# EAGLE board pinoccio (EAGLE 7.2.0)
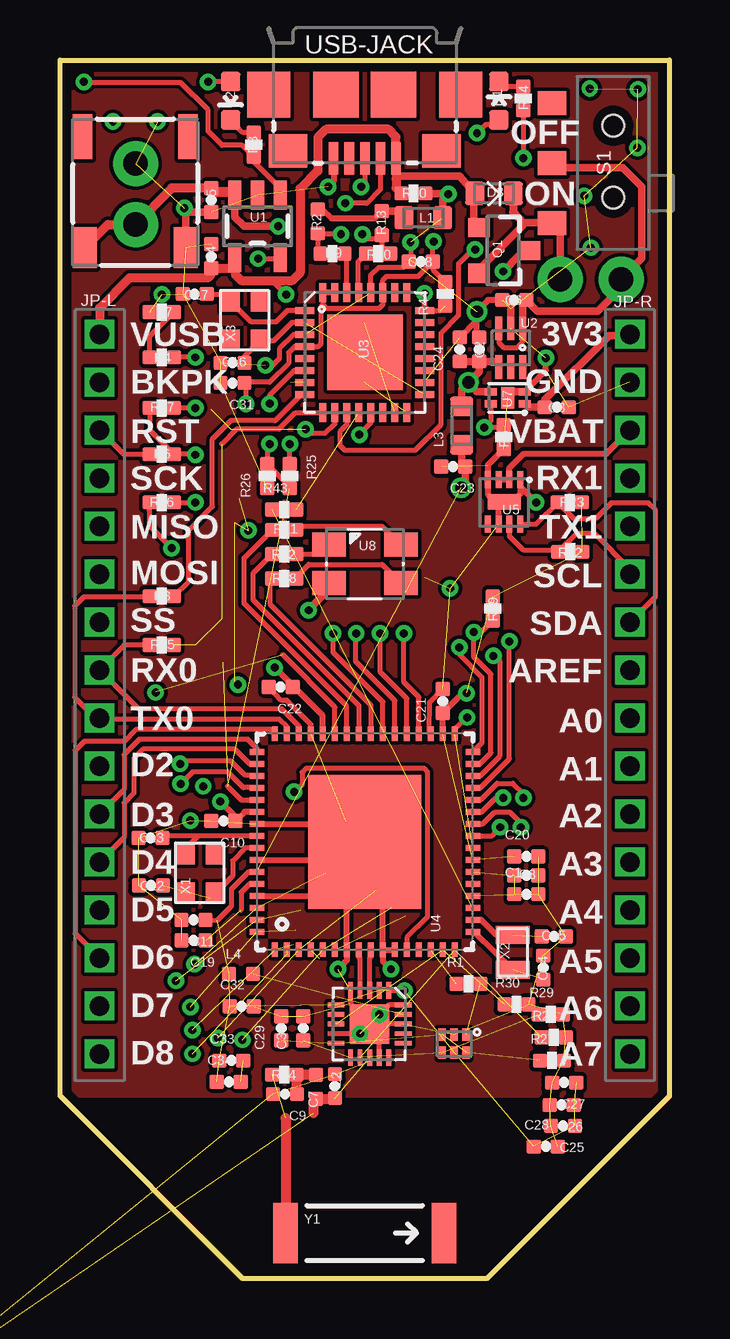
[diagram p0: board, top side]
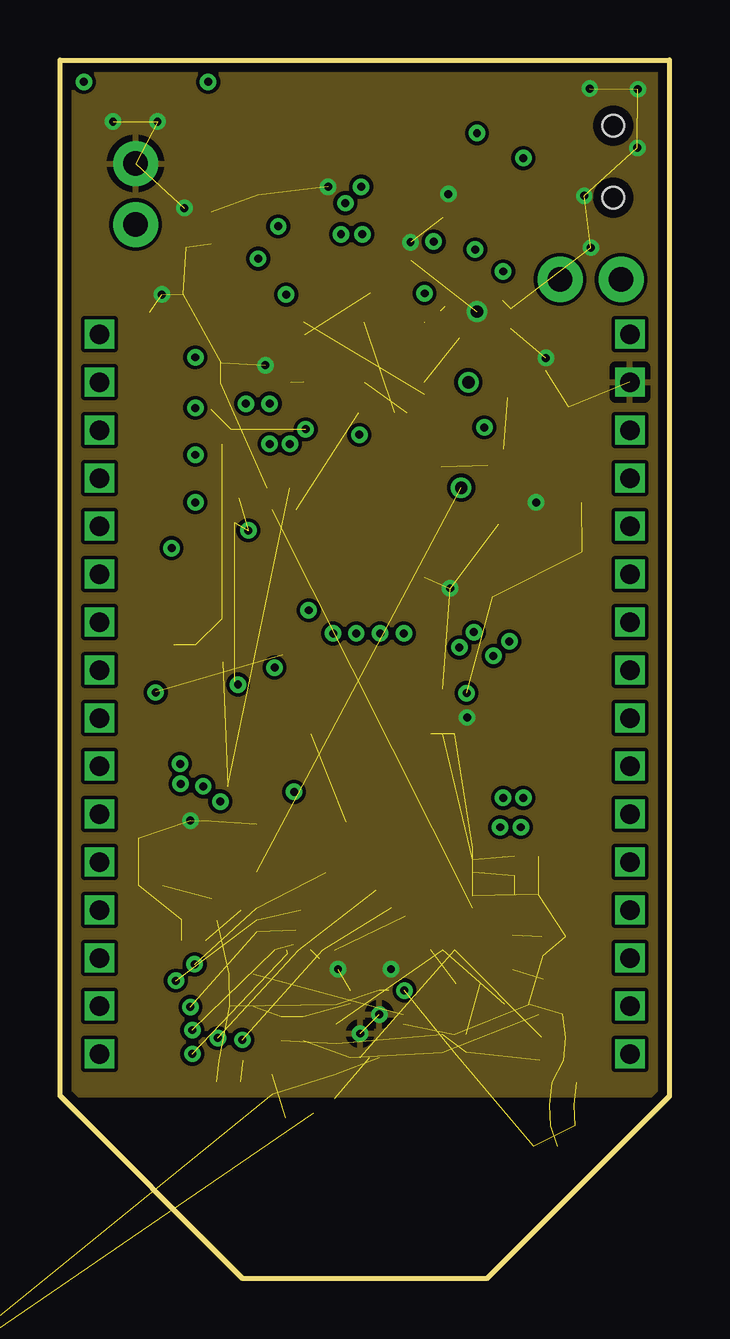
[diagram p1: board, inner layer Ground]
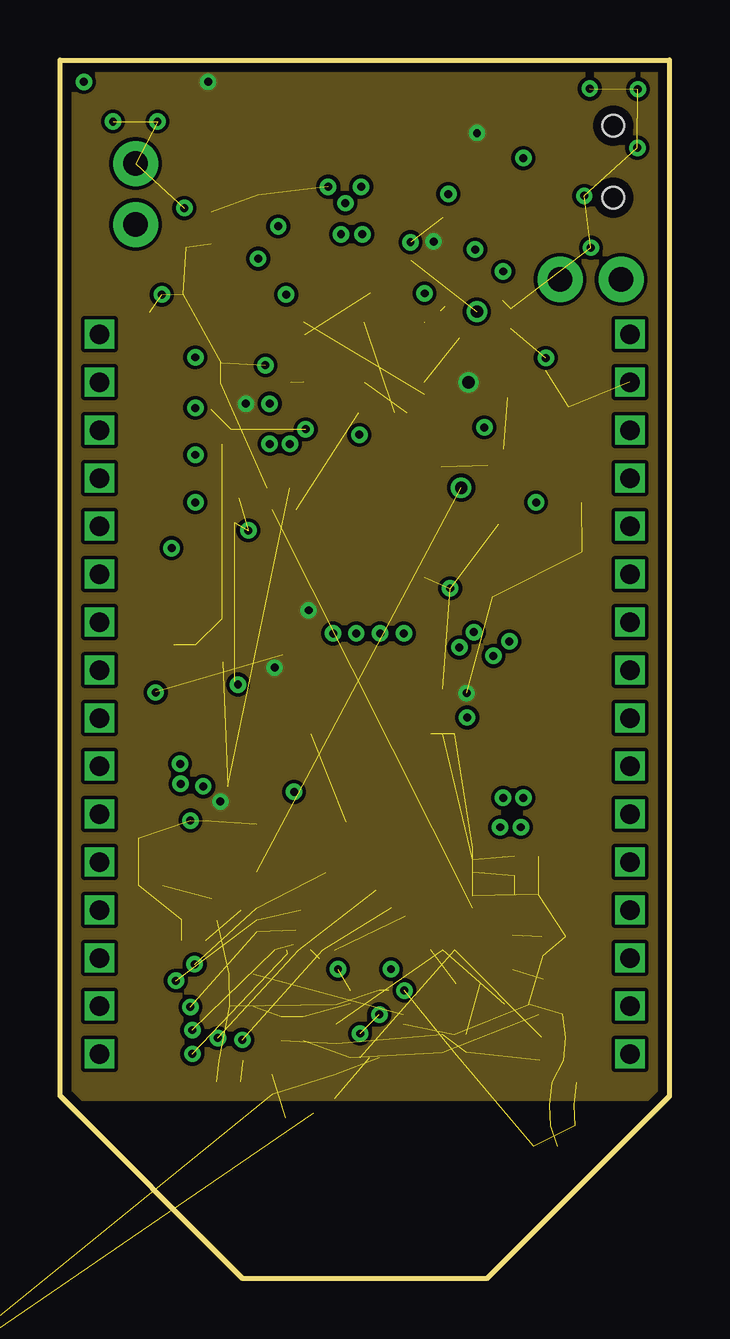
[diagram p2: board, inner layer Power]
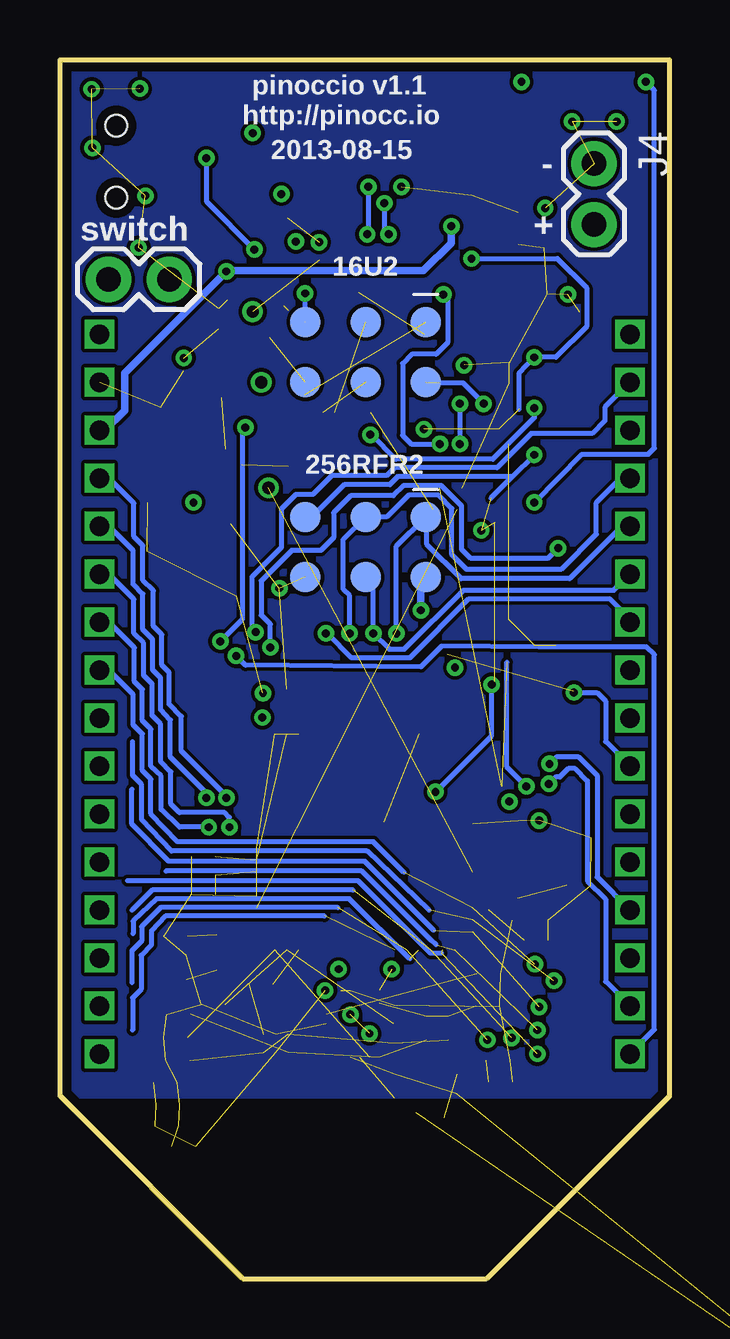
[diagram p3: board, bottom side, seen from below]

Size 25.4 x 50.8 mm. Coordinates in mm from the lower left corner, seen from the top.
Outline: 17.78,0 7.62,0 0,7.62 0,50.8 25.4,50.8 25.4,7.62 17.78,0
Copper layers (1*2*15*16): Top 0.0356mm / dielectric 1.5011mm / Ground 0.0356mm / dielectric 0.1499mm / Power 0.0356mm / dielectric 0.2007mm / Bottom 0.0356mm
Design rules "default *": minimum track width 6mil, minimum drill 13mil, track to track 6mil, track to pad 6mil, pad to pad 6mil, via to via 6mil, smd to smd 6mil, copper to edge 15mil, drill to drill 6mil, minimum pad ring 7mil, minimum via ring 7mil, stop-mask expansion 4mil, vias tented up to drill 16mil, thermal gap 10mil
Net classes: 0 Default: width 0.203 mm; 1 VCC: width 0.203 mm; 2 AVCC: width 0.203 mm; 3 ButtonSignal: width 0.203 mm; 4 RF Antenna: width 0.305 mm; 5 GND: width 0.203 mm; 6 AGND: width 0.203 mm
tKeepout: area 12.5,11.3 to 13.4,11.7; area 11.5,11.9 to 12.2,12.4; area 13.1,12.1 to 13.7,12.4; area 11.5,11.7 to 12,11.9; area 11.5,11.3 to 12.4,11.7

## Footprints (pad centres in the part's own frame; a part is rotated, then mirrored left to right if it is on the bottom)
0402-CAP = smd 0.6 x 0.6: 1 -0.5,0; 2 0.5,0
LED-0603 = smd 0.8 x 0.8: A 0,-0.8; C 0,0.8
0603-DIODE = smd 0.8 x 0.95: A -0.8,0; C 0.8,0
2X3-PAD = smd 1.27 x 1.27: 1 0,0; 2 0,2.508; 3 2.508,0; 4 2.508,2.508; 5 5.016,0; 6 5.016,2.508
1X02 = drill 1.016 pad 1.88: 1 0,0; 2 2.54,0
1X16_2MM = drill 0.813 square: P$1 0,0; P$2 2,0; P$3 4,0; P$4 6,0; P$5 8,0; P$6 10,0; P$7 12,0; P$8 14,0; P$9 16,0; P$10 18,0; P$11 20,0; P$12 22,0; P$13 24,0; P$14 26,0; P$15 28,0; P$16 30,0
JST-SFH = smd 1.7 x 1: 1 5.36,4.7; 2 5.36,0.5 | smd 1.876 x 0.813: P$0 0.74,4.8; P$1 0.74,0.4
0603 = smd 0.8 x 0.95: 1 -0.8,0; 2 0.8,0
0402 = smd 0.6 x 0.6: 1 -0.5,0; 2 0.5,0
SOT23-3 = smd 0.8 x 0.9: 1 -0.95,-1; 2 0.95,-1; 3 0,1.1
0402-RES = smd 0.6 x 0.6: 1 -0.5,0; 2 0.5,0
SWITCH-SPDT-SMD = smd 1 x 1.2: 1 -2.5,-2.55; 2 0,-2.55; 3 2.5,-2.55 | hole 0.9: -1.55,0; 1.45,0
SOT23-5 = smd 0.55 x 1.2: 1 -0.95,-1.3; 2 0,-1.3; 3 0.95,-1.3; 4 0.95,1.3; 5 -0.95,1.3
SOT666 = smd 0.3 x 0.99: P$1 0.3,-0.13; P$2 0.8,-0.13; P$3 1.3,-0.13; P$4 1.3,1.48; P$5 0.8,1.48; P$6 0.3,1.48
QFN-32 = smd 0.285 x 0.8: 1 -1.75,-2.5; 2 -1.25,-2.5; 3 -0.75,-2.5; 4 -0.25,-2.5; 5 0.25,-2.5; 6 0.75,-2.5; 7 1.25,-2.5; 8 1.75,-2.5; 17 1.75,2.5; 18 1.25,2.5; 19 0.75,2.5; 20 0.25,2.5; 21 -0.25,2.5; 22 -0.75,2.5; 23 -1.25,2.5; 24 -1.75,2.5 | smd 0.8 x 0.285: 9 2.5,-1.75; 10 2.5,-1.25; 11 2.5,-0.75; 12 2.5,-0.25; 13 2.5,0.25; 14 2.5,0.75; 15 2.5,1.25; 16 2.5,1.75; 25 -2.5,1.75; 26 -2.5,1.25; 27 -2.5,0.75; 28 -2.5,0.25; 29 -2.5,-0.25; 30 -2.5,-0.75; 31 -2.5,-1.25; 32 -2.5,-1.75 | smd 3.15 x 3.15: EP 0,0
QFN-64 = smd 0.6 x 0.25: 1 -4.5,3.75; 2 -4.5,3.25; 3 -4.5,2.75; 4 -4.5,2.25; 5 -4.5,1.75; 6 -4.5,1.25; 7 -4.5,0.75; 8 -4.5,0.25; 9 -4.5,-0.25; 10 -4.5,-0.75; 11 -4.5,-1.25; 12 -4.5,-1.75; 13 -4.5,-2.25; 14 -4.5,-2.75; 15 -4.5,-3.25; 16 -4.5,-3.75; 33 4.5,-3.75; 34 4.5,-3.25; 35 4.5,-2.75; 36 4.5,-2.25; 37 4.5,-1.75; 38 4.5,-1.25; 39 4.5,-0.75; 40 4.5,-0.25; 41 4.5,0.25; 42 4.5,0.75; 43 4.5,1.25; 44 4.5,1.75; 45 4.5,2.25; 46 4.5,2.75; 47 4.5,3.25; 48 4.5,3.75 | smd 0.25 x 0.6: 17 -3.75,-4.5; 18 -3.25,-4.5; 19 -2.75,-4.5; 20 -2.25,-4.5; 21 -1.75,-4.5; 22 -1.25,-4.5; 23 -0.75,-4.5; 24 -0.25,-4.5; 25 0.25,-4.5; 26 0.75,-4.5; 27 1.25,-4.5; 28 1.75,-4.5; 29 2.25,-4.5; 30 2.75,-4.5; 31 3.25,-4.5; 32 3.75,-4.5; 49 3.75,4.5; 50 3.25,4.5; 51 2.75,4.5; 52 2.25,4.5; 53 1.75,4.5; 54 1.25,4.5; 55 0.75,4.5; 56 0.25,4.5; 57 -0.25,4.5; 58 -0.75,4.5; 59 -1.25,4.5; 60 -1.75,4.5; 61 -2.25,4.5; 62 -2.75,4.5; 63 -3.25,4.5; 64 -3.75,4.5 | smd 5.588 x 4.699: PADDLE 0,0
DFN-8 = smd 0.25 x 0.7: P$1 0.125,0.35; P$2 0.575,0.35; P$3 1.025,0.35; P$4 1.475,0.35; P$5 1.475,2.2; P$6 1.025,2.2; P$7 0.575,2.2; P$8 0.125,2.2 | smd 1.37 x 0.64: P$9 0.8,1.275
TDFN4 = smd 0.325 x 0.5: P$1 0.35,0.1; P$2 0.85,0.1; P$3 0.85,1.5; P$4 0.35,1.5 | smd 0.9 x 0.55: P$5 0.6,0.8
PLCC4 = smd 1.4 x 1: P$1 -1.5,0.75; P$2 -1.5,-0.85; P$3 1.5,-0.85; P$4 1.5,0.75
QFN-20-SE2438T = smd 0.7 x 0.2: 1 -1.4,0.8; 2 -1.4,0.4; 3 -1.4,0; 4 -1.4,-0.4; 5 -1.4,-0.8; 11 1.4,-0.8; 12 1.4,-0.4; 13 1.4,0; 14 1.4,0.4; 15 1.4,0.8 | smd 0.2 x 0.7: 6 -0.8,-1.4; 7 -0.4,-1.4; 8 0,-1.4; 10 0.8,-1.4; 16 0.8,1.4; 17 0.4,1.4; 18 0,1.4; 19 -0.4,1.4; 20 -0.8,1.4 | smd 1.65 x 1.65: EP 0,0 | drill 0.33: P$1 0.4,-0.4; P$2 -0.4,0.4
MICROPAK = smd 0.3 x 0.52: P$1 0.15,0.26; P$2 0.65,0.26; P$3 1.15,0.26; P$4 1.15,1.01; P$5 0.65,1.01; P$6 0.15,1.01
USB-MICROB = smd 0.4 x 1.35: D+ 0,2.65; D- -0.65,2.65; GND 1.3,2.65; ID 0.65,2.65; VBUS -1.3,2.65 | smd 1.8 x 1.9: MT1 -4,0; MT2 4,0 | smd 1.9 x 1.9: MT3 -1.2,0; MT4 1.2,0 | smd 1.6 x 1.4: MT5 3.2,2.35; MT6 -3.2,2.35
CRYSTAL-SMD-2.5X2-ABM10 = smd 0.9 x 0.8: P$1 -0.85,-0.65; P$2 0.8,-0.65; P$3 0.8,0.6; P$4 -0.85,0.6
CRYSTAL-SMD-2X1.2-ABS06 = smd 0.75 x 1.4: P$1 -0.725,0; P$2 0.725,0
ANTENNA-CHIP5 = smd 1.016 x 2.54: FEED -3.302,0; NC 3.302,0

## Placement (x,y rotation side)
C1  1.0uF  [0402-CAP]  19.43,16.03 0 top
C2  2.2uF  [0402-CAP]  17.47,38.73 90 top
C3  0.1uF  [0402-CAP]  20.7,36.32 0 top
C4  4.7uF  [0402-CAP]  6.3,42.62 90 top
C5  4.7uF  [0402-CAP]  6.3,44.96 270 top
C6  1.0uF  [0402-CAP]  18.92,40.8 180 top
C7  1.0pF  [0402-CAP]  11.46,8.03 90 top
C8  1.0uF  [0402-CAP]  19.43,16.81 0 top
C9  1.0pF  [0402-CAP]  9.37,7.7 180 top
C10  1.0uF  [0402-CAP]  6.81,19.08 180 top
C11  1.0uF  [0402-CAP]  5.56,14.96 180 top
C12  10pF  [0402-CAP]  3.79,16.39 180 top
C13  10pF  [0402-CAP]  3.77,18.37 180 top
C14  12pF  [0402-CAP]  20.14,12.97 90 top
C15  12pF  [0402-CAP]  20.57,14.26 0 top
C16  10pF  [0402-CAP]  7.19,38.18 180 top
C17  10pF  [0402-CAP]  5.61,41.05 180 top
C18  1.0uF  [0402-CAP]  15.04,42.39 180 top
C19  1.0uF  [0402-CAP]  5.56,14.1 180 top
C20  1.0uF  [0402-CAP]  19.43,17.6 0 top
C21  1.0uF  [0402-CAP]  15.95,24.08 90 top
C22  1.0uF  [0402-CAP]  9.19,24.66 180 top
C23  1.0uF  [0402-CAP]  16.38,33.86 180 top
C24  1.0uF  [0402-CAP]  16.66,38.73 90 top
C25  10pF  [0402-CAP]  20.95,6.38 180 top
C26  10pF  [0402-CAP]  20.9,7.24 180 top
C27  0.1uF  [0402-CAP]  21.01,8.18 180 top
C28  0.1uF  [0402-CAP]  20.24,5.51 0 top
C29  22pF  [0402-CAP]  9.22,10.44 90 top
C30  22pF  [0402-CAP]  10.13,10.44 90 top
C31  0.1uF  [0402-CAP]  7.19,37.34 180 top
C32  0.1uF  [0402-CAP]  7.57,11.35 0 top
C33  0.1uF  [0402-CAP]  7.14,9.09 0 top
C34  10pF  [0402-CAP]  7.04,8.2 0 top
C35  DNI  [0402-CAP]  -12.29,-9.09 0 top  (outside the outline)
D1  (Green)  [LED-0603]  18.29,49.1 0 top
D2  Yellow  [LED-0603]  7.11,49.1 180 top
D3  [0603-DIODE]  18.08,45.24 0 top
J1  AVR_SPI_PRG_6  [2X3-PAD]  10.16,39.88 180 bottom
J2  AVR_SPI  [2X3-PAD]  10.16,31.75 180 bottom
J3  Switch  [1X02]  20.84,41.66 180 bottom
J4  Ext Battery  [1X02]  3.15,46.48 270 bottom
JP-L  M162MM  [1X16_2MM]  1.65,39.37 270 top
JP-R  M162MM  [1X16_2MM]  23.75,39.37 270 top
JST  SFH  [JST-SFH]  0.53,48.34 270 top
L1  BEAD  [0603]  15.14,44.22 180 top
L2  4.7nH  [0402]  10.67,8 270 top
L3  BEAD  [0603]  16.74,35.56 90 top
L4  3.6nH  [0402]  7.54,12.7 0 top
Q1  PFET  [SOT23-3]  18.46,42.86 270 top
R1  2k  [0402-RES]  17.02,12.29 0 top
R2  VAR  [0402]  10.74,44.07 90 top
R3  470  [0402-RES]  8.08,47.27 90 top
R4  2K  [0402-RES]  4.24,38.4 180 top
R5  100k  [0402-RES]  18.49,35.08 270 top
R6  470  [0402-RES]  4.24,34.37 0 top
R7  1K  [0402-RES]  4.24,40.28 0 top
R8  1K  [0402-RES]  4.24,28.45 0 top
R9  22  [0402-RES]  11.35,42.72 0 top
R10  22  [0402-RES]  13.26,42.72 180 top
R11  470  [0402-RES]  9.35,31.22 0 top
R12  470  [0402-RES]  9.35,30.2 0 top
R13  VAR  [0402]  13.41,43.99 90 top
R14  470  [0402-RES]  19.3,49.2 90 top
R15  1K  [0402-RES]  4.24,26.42 0 top
R16  2K  [0402-RES]  4.24,32.36 0 top
R17  10K  [0402-RES]  4.24,36.3 0 top
R18  470  [0402-RES]  9.35,29.18 0 top
R19  100K  [0402-RES]  18.03,27.94 270 top
R20  100k  [0402-RES]  14.73,45.24 0 top
R22  2K  [0402-RES]  21.26,30.3 180 top
R23  2K  [0402-RES]  21.23,32.36 180 top
R24  0  [0402-RES]  9.35,8.51 180 top
R25  68K  [0402-RES]  9.58,33.45 270 top
R26  100K  [0402-RES]  8.64,33.45 90 top
R27  100K  [0402-RES]  20.5,9.09 0 top
R28  100K  [0402-RES]  20.57,10.06 0 top
R29  100K  [0402-RES]  20.45,11.02 0 top
R30  100K  [0402-RES]  19.02,11.43 0 top
R43  1K  [0402-RES]  9.35,32.05 0 top
R44  10K  [0402-RES]  16.05,41.05 90 top
S1  SPST  [SWITCH-SPDT-SMD]  23.05,46.51 270 top
U1  MCP73832  [SOT23-5]  8.23,43.87 180 top
U2  STLQ015XX  [SOT666]  19.58,39.48 180 top
U3  ATMEGA16U2  [QFN-32]  12.7,38.61 270 top
U4  ATMEGA256RFR2  [QFN-64]  12.7,18.21 90 top
U5  MAX17048  [DFN-8]  19.3,33.66 180 top
U7  SWITCH  [TDFN4]  19.46,36.12 90 top
U8  LED-RGB  [PLCC4]  12.7,29.84 0 top
U$17  SE2438T  [QFN-20-SE2438T]  12.9,10.62 270 top
U$18  INVERTER-DUALPAK  [MICROPAK]  17.07,10.44 180 top
USB-JACK  [USB-MICROB]  12.7,49.35 180 top
X1  16MHz  [CRYSTAL-SMD-2.5X2-ABM10]  5.82,16.92 90 top
X2  32.768k  [CRYSTAL-SMD-2X1.2-ABS06]  18.86,13.6 90 top
X3  16MHz  [CRYSTAL-SMD-2.5X2-ABM10]  7.7,39.95 90 top
Y1  ANTENNA2SMD5  [ANTENNA-CHIP5]  12.7,1.91 0 top

## Library data of the parts
C1 C8 C10 C11 C19-C22 = Pinoccio; MFG: C1005X7R1H104K050BB
C2-C7 C9 C12-C18 C23-C35 D1-D3 J1-J4 JP-L JP-R L1-L4 Q1 R1-R20 R22-R30 R43 R44 S1 U1-U5 U7 U8 U$17 USB-JACK X1-X3 = Pinoccio
JST = bean
U$18 = Pinoccio; MFG: NC7WV04L6X
Y1 = SparkFun

## Nets
16U2-MISO: J1.1 U3.17
16U2-MOSI: J1.4 U3.16
16U2-RESET: J1.5 R44.1 U3.24
16U2-SCK: J1.3 U3.15
A0: U4.63
A0-IN: JP-R.P$9
A1: U4.64
A1-IN: JP-R.P$10
A2: U4.1
A2-IN: JP-R.P$11
A3: U4.2
A3-IN: JP-R.P$12
A4: U4.3
A4-IN: JP-R.P$13
A5: U4.4
A5-IN: JP-R.P$14
A6: U4.5
A6-IN: JP-R.P$15
A7: U4.6
A7-IN: JP-R.P$16
AGND: C33.2 C34.2
ANT [RF Antenna]: C7.1 C35.1 L2.2 U$17.13
AREF: JP-R.P$8 U4.62
AVCC: C11.1 C23.1 C25.1 C26.1 C27.1 C28.1 C32.1 C33.1 C34.1 L3.1 L4.1 U4.59 U$17.1 U$17.2 U$17.6 U$18.P$5
AVDD: C19.1 U4.60
BKPK-BUS: JP-L.P$2 R19.2 U4.31
BKPKVCC-EN: R5.1 U4.29 U7.P$4
CHGSTATUS: R16.1 U4.32
CPS: R30.1 U4.15 U$17.8
CRX: C29.1 R27.1 U$17.10 U$18.P$3 U$18.P$6
CSD: R28.1 U4.16 U$17.12
CTX: C30.1 R29.1 U$17.11 U$18.P$4
D2: JP-L.P$10 U4.43
D3: JP-L.P$11 U4.49
D4: JP-L.P$12 U4.50
D5: JP-L.P$13 U4.51
D6: JP-L.P$14 U4.48
D7: JP-L.P$15 U4.52
D8: JP-L.P$16 U4.30
DVDD: C1.1 C8.1 U4.21 U4.22
GND [GND]: C1.2 C2.2 C3.2 C4.2 C5.2 C6.2 C7.2 C8.2 C9.2 C10.2 C11.2 C12.2 C13.2 C14.2 C15.2 C16.2 C17.2 C18.2 C19.2 C20.2 C21.2 C22.2 C23.2 C24.2 C25.2 C26.2 C27.2 C28.2 C29.2 C30.2 C31.2 C32.2 C35.2 J1.6 J2.6 J4.1 JP-R.P$2 JST.1 L1.1 R5.2 R7.1 R20.2 R26.1 R27.2 R28.2 R29.2 R30.2 U1.2 U2.P$2 U3.3 U3.28 U4.7 U4.10 U4.11 U4.20 U4.24 U4.33 U4.35 U4.45 U4.55 U4.58 U4.61 U4.PADDLE U5.P$1 U5.P$4 U5.P$6 U5.P$9 U7.P$2 U7.P$5 U$17.5 U$17.14 U$17.18 U$17.20 U$17.EP U$17.P$1 U$17.P$2 U$18.P$2 USB-JACK.GND
LED-BLU: R18.1 U4.40
LED-GRN: R11.1 U4.42
LED-RED: R12.1 U4.41
MISO: J2.1 JP-L.P$5 U4.39
MOSI: J2.4 JP-L.P$6 U4.38
N$1: R12.2 U8.P$1
N$3: L4.2 U$17.19
N$4: R43.2 U3.12
N$5: R11.2 U8.P$4
N$6: R18.2 U8.P$3
N$8: R4.2 R7.2
N$9: L1.2 R2.2 R13.2
N$10: R1.2 U$18.P$1
N$11: R3.1 R16.2 U1.1
N$17: C14.1 U4.17 X2.P$1
N$18: C15.1 U4.18 X2.P$2
N$22: D2.C R3.2
N$24: R17.2 U3.13
N$25: R15.2 U3.9
N$26: R8.2 U3.8
N$27: C9.1 L2.1 R24.1
N$28: R24.2 Y1.FEED
N$51: D3.C J3.1 Q1.2 S1.3
N$59: R14.1 U3.11
N$62: D1.C R14.2
PROG: R4.1 U1.5 U3.10
RESET: J2.5 R6.2 R17.1 U4.12
RESET-EN: JP-L.P$3 R6.1
RF_N: U4.9 U$17.3
RF_P: U4.8 U$17.4
RX0: JP-L.P$8 R15.1 U4.46
RX1: JP-R.P$4 U4.27
RX/TX: R1.1 U4.14
SCK: J2.3 JP-L.P$4 U4.37
SCL: JP-R.P$6 R22.2 U4.25 U5.P$7
SDA: JP-R.P$7 R23.2 U4.26 U5.P$8
SEROPN: R43.1 U4.19
SSN: JP-L.P$7 U4.36
TX0: JP-L.P$9 R8.1 U4.47
TX1: JP-R.P$5 U4.28
USBD_N: R9.2 U3.30
USBD_P: R10.2 U3.29
USBDIN_N: R2.1 R9.1 USB-JACK.D-
USBDIN_P: R10.1 R13.1 USB-JACK.D+
VBAT: C5.1 J4.2 JP-R.P$3 JST.2 Q1.3 U1.3 U5.P$2 U5.P$3
VBUS: C4.1 D3.A JP-L.P$1 Q1.1 R20.1 R25.1 U1.4 USB-JACK.VBUS
VBUS-SENSE: R25.2 R26.2 U3.6 U4.53
VCC [VCC]: C2.1 C10.1 C18.1 C20.1 C21.1 C22.1 C24.1 C31.1 D1.A D2.A J1.2 J2.2 L3.2 R19.1 R22.1 R23.1 R44.2 U2.P$4 U3.4 U3.27 U3.31 U3.32 U4.23 U4.34 U4.44 U4.54 U7.P$3 U8.P$2
VCC-AE: C3.1 JP-R.P$1 U7.P$1
VIN: C6.1 J3.2 S1.2 U2.P$1 U2.P$3
X1_N: C13.1 U4.56 X1.P$3
X1_P: C12.1 U4.57 X1.P$1
X3_N: C16.1 U3.2 X3.P$1
X3_P: C17.1 U3.1 X3.P$3

## Tracks (layer width: path | path; a pad name or v marks a point on that pad's centre or on a via)
16U2-MISO  (1 unrouted)
16U2-MOSI  (1 unrouted)
16U2-RESET  (via drill 0.33)  (2 unrouted)
  Top 0.203: v15.19,41.07 U3.24 15.86,40.36
  Bottom 0.203: 15.19,39.87 v15.19,41.07
16U2-SCK  (1 unrouted)
A0  (via drill 0.33)  (2 unrouted)
  Top 0.203: 8.18,14.96 U4.63
  Bottom 0.203: 10.03,15.37 12.6,17.83 20.75,17.83 22,19.15 22,20.6 22.38,20.98 22.38,22.38
  other vias: 4.83,12.42
A1  (via drill 0.33)  (2 unrouted)
  Bottom 0.203: 9.83,14.53 12.7,17.4 20.88,17.4 22.4,18.95 22.4,20.41
  other vias: 5.44,11.33
A2  (via drill 0.33)  (2 unrouted)
  Bottom 0.203: 9.73,13.92 9.96,14.12 12.83,16.99 20.99,16.99
  other vias: 5.51,10.36
A3  (via drill 0.33)  (2 unrouted)
  Bottom 0.203: 9.5,13.56 9.96,13.56 12.98,16.59 22.58,16.59
  other vias: 5.51,9.37
A4  (via drill 0.33)  (2 unrouted)
  Bottom 0.203: 13.18,16.2 21.57,16.2 22.4,15.37
  other vias: 6.58,10.03
A5  (1 unrouted)
  Bottom 0.203: 10.82,13.34 13.35,15.84 21.38,15.84 22.35,14.91 22.35,14.39
A6  (via drill 0.33)  (2 unrouted)
  Bottom 0.203: 13.82,15.47 21.2,15.47 22,14.68 22,14.07 22.4,13.66 22.4,12.34
  other vias: 7.6,9.96
A7  (1 unrouted)
  Bottom 0.203: 14.38,15.11 21.01,15.11 21.59,14.5 21.59,13.92 22.02,13.49 22.02,12.06 22.38,11.71 22.38,10.36
AGND  (1 unrouted)
ANT  (2 unrouted)
  Top 0.406: 10.57,6.91 10.57,7.4 L2.2 11.46,7.5 C7.1
AREF  (via drill 0.33)  (2 unrouted)
  Bottom 0.203: 11.07,16.94 12.34,18.21 20.5,18.21 21.61,19.38 21.61,20.83 21.97,21.18 21.97,22.71 22.35,23.09 22.35,24.35 23.37,25.37 JP-R.P$8
  other vias: 5.61,13.11
AVCC  (via drill 0.33, 0.51)  (13 unrouted)
  Top 0.203: U$17.1 v14.35,12.02 v14.35,12.01 | U4.59 7.87,16.96 7.14,16.23 7.14,15.52 6.55,14.94 C11.1
  Top 0.305: L3.1 16.74,34 C23.1 16.88,33.14 v16.71,32.97
AVDD  (1 unrouted)
  Top 0.203: U4.60 7.9,16.46 7.54,16.1 7.54,15.37
BKPK-BUS  (via drill 0.33)
  Top 0.203: U4.31 17.5,21.46 17.96,21.92 17.96,25.2 17.25,25.91 v17.25,26.95 17.54,26.95 R19.2
  Bottom 0.203: v17.25,26.95 17.4,27.1 17.4,29.26 16.18,30.48 16.18,32.08 15.57,32.69 14.86,32.69 14.07,33.48 11.79,33.48 11.46,33.81 7.19,33.81 5.77,35.23 3.23,35.23 2.69,35.76 2.69,36.33 JP-L.P$2
BKPKVCC-EN  (via drill 0.33)
  Top 0.203: U4.29 17.52,20.46 18.72,21.67 v18.72,26.57 | R5.1 18.4,35.48 v17.68,35.48 17.96,35.76 U7.P$4
  Bottom 0.203: v18.72,26.57 17.8,27.48 17.8,35.36 v17.68,35.48
CHGSTATUS  (via drill 0.33)
  Top 0.203: v16.64,26.31 16.64,26.01 17.58,25.07 17.58,22.34 U4.32 | R16.1 3.72,32.02 3.72,31.39 v4.65,30.45
  Bottom 0.203: v16.64,26.31 16.64,27.28 17.02,27.66 17.02,29.08 15.75,30.35 14.53,30.35 13.99,30.89 13.99,31.93 13.28,32.64 11.51,32.64 11.07,33.07 9.53,33.07 8.66,32.21 8.66,30.4 8.28,30.02 5.08,30.02 v4.65,30.45
CPS  (2 unrouted)
CRX  (4 unrouted)
CSD  (2 unrouted)
CTX  (3 unrouted)
D2  (via drill 0.33)  (1 unrouted)
  Top 0.203: U4.43 11.45,23.83 9.27,26.01 | 3.99,24.49 v3.99,24.43
  Bottom 0.203: v3.99,24.43 3.02,24.43 2.67,24.08 2.67,22.39 JP-L.P$10
D3
  Top 0.203: U4.49 8.2,22.1 7.82,22.48 3.3,22.48 2.67,21.84 2.67,20.39 JP-L.P$11
D4
  Top 0.203: U4.50 7.9,21.46 7.29,22.07 3.45,22.07 3.07,21.69 3.07,20.24 2.67,19.84 2.67,18.39 JP-L.P$12
D5  (via drill 0.33)
  Top 0.203: U4.51 8.18,20.98 7.72,20.98 7.11,21.59 5.13,21.59 v5,21.46
  Bottom 0.203: JP-L.P$13 3.02,16.74 3.02,20.98 3.79,21.74 4.72,21.74 v5,21.46
D6
  Top 0.203: U4.48 8.78,22.89 3.15,22.89 2.67,22.4 1.02,22.4 0.64,22.02 0.64,14.39 JP-L.P$14
D7  (via drill 0.33)
  Top 0.203: U4.52 8.19,20.47 7.64,20.47 6.99,21.13 5.54,21.13 v5.03,20.62
  Bottom 0.203: JP-L.P$15 2.67,12.39 2.67,15.82 3.43,16.59 3.43,20.75 3.94,21.26 4.22,21.26 4.57,20.9 4.75,20.9 v5.03,20.62
D8  (via drill 0.33)
  Top 0.203: U4.30 17.51,20.96 18.34,21.79 18.34,25.73 18.09,25.98 v18.06,25.96
  Bottom 0.203: v18.06,25.96 17.68,25.58 10.36,25.5 9.5,26.36 5.44,26.34 0.96,26.34 0.64,26.01 0.64,10.39 JP-L.P$16
DVDD  (3 unrouted)
GND  (via drill 0.33, 0.51)  (65 unrouted)
  Top 0.203: U3.28 12.95,41.85 13.28,42.16 14.33,42.16 C18.2 14.61,42.46 v14.61,43.2 | U4.35 15.42,22.71 15.39,22.86 15.4,24.03 C21.2 | U4.33 16.45,22.94 v16.97,23.39 | U4.45 10.45,23.1 9.45,24.11 9.23,24.11 C22.2 | U3.3 9.74,39.36 9.14,38.76 9.14,38.35 8.87,38.08 v8.56,38.08 | U$17.18 13.7,10.62 U$17.P$2 13.7,11.42 U$17.20 | U$17.5 12.1,11.47 12.32,11.25 12.32,11.2 U$17.EP 13.28,10.24 13.28,9.98 13.3,9.96 U$17.14
  Top 0.254: 11.95,16 U4.7 11.95,13.27 v11.58,12.9 | 11.95,16 11.95,16.18 | 11.95,16.18 11.95,17.6 | 11.95,17.6 11.95,17.82 12.34,18.21 U4.PADDLE 11.91,19 11.91,19.02 | U4.58 11.81,17.46 11.95,17.6 | U4.61 11.91,15.96 11.95,16 | 13.45,16.17 13.46,16.18 11.95,16.18 | v13.79,12.9 13.45,13.22 U4.10 | U4.55 11.82,18.96 11.91,19.05 11.91,19.02 | U4.10 13.45,17.54 13.44,17.55 13.39,17.55 11.91,19.02 | USB-JACK.GND 11.4,45.74 v11.18,45.52 | U4.10 U4.11 | U5.P$6 18.28,32.16 U5.P$9 | U5.P$9 18.35,32.54 17.98,32.54 17.83,32.69 U5.P$4 17.83,33.91 R5.2 | U5.P$9 18.84,32.38 19.18,32.72 U5.P$1 19.18,33.02 v19.84,32.36 | U7.P$2 20.24,37.86 v20.24,38.38 | C24.2 17.37,39.95 | C2.2 17.37,39.46 17.37,39.95 | 17.37,39.95 v17.37,40.31 17.84,40.8 C6.2
  Top 0.305: R20.2 16.15,45.24 v16.18,45.21 15.94,44.97 L1.1 | C5.2 5.35,44.46 v5.18,44.63 5.23,44.58 JST.1 | U2.P$2 18.78,40.44 | U7.P$2 18.91,36.97 U7.P$5
  other vias: 2.21,48.23 4.06,48.23 4.24,41.02 24.05,47.14 24.08,49.58 16.26,28.78 21.84,45.14 22.07,49.61 22.12,42.98 5.44,19.1
  pour Ground: 0,50.8 0,50.77 -0.05,7.67 25.32,7.67 25.32,50.83 0.15,50.8
LED-BLU
  Top 0.203: U4.40 12.95,23.91 8.76,28.09 8.76,29.1 R18.1 8.66,29.35
LED-GRN
  Top 0.203: U4.42 11.94,22.72 11.94,23.88 7.67,28.14 7.67,30.04 R11.1
LED-RED
  Top 0.203: U4.41 12.45,23.9 8.05,28.3 8.05,29.41 R12.1
MISO  (via drill 0.33)
  Top 0.203: U4.39 13.45,24.04 11.38,26.11 v11.38,26.9
  Bottom 0.203: JP-L.P$5 1.98,31.37 4.17,29.18 8.69,29.18 10.11,30.61 10.11,31.7 J2.1 11.38,30.53 v11.38,26.9
MOSI  (via drill 0.33)
  Top 0.203: U4.38 13.95,24.1 12.32,25.73 12.32,26.87 v12.34,26.9
  Bottom 0.203: JP-L.P$6 2.32,28.7 8.59,28.7 11.05,26.24 11.68,26.24 v12.34,26.9 12.34,28.92 J2.4
N$1
  Top 0.203: R12.2 11.2,30.2 U8.P$1
N$2
  pour Top: 0.03,50.77 0,50.75 -0.03,7.67 25.35,7.67 25.35,50.8 0,50.8 0,50.77
N$3  (1 unrouted)
N$4  (1 unrouted)
N$5
  Top 0.203: R11.2 10.08,31.37 13.41,31.37 14.19,30.59 U8.P$4
N$6
  Top 0.203: R18.2 9.85,29.25 10.36,29.77 13.43,29.77 U8.P$3
N$8
  Top 0.203: R4.2 3.74,39.28 R7.2
N$9
  Top 0.254: R2.2 10.93,44.57 11.3,44.2 13.11,44.2 R13.2
  Top 0.305: R13.2 14.01,44.5 L1.2
N$10  (1 unrouted)
N$11  (via drill 0.33)
  Top 0.203: U1.1 9.18,45.48 9.1,45.53 8.08,46.56 R3.1 7.6,47.24 6.76,47.24 6.17,47.83 6.17,48.72 5.03,49.86 1.02,49.86 v0.99,49.89 | R16.2 v5.64,32.36
  Bottom 0.203: v5.64,32.36 3.66,34.37 0.89,34.37 0.64,34.62 0.64,49.53 v0.99,49.89
N$12
  pour Bottom: 25.37,7.67 0,7.67 0,50.77 25.4,50.77 25.4,7.72
N$17  (1 unrouted)
  Top 0.254: U4.17 17.28,14.41 X2.P$1
N$18  (1 unrouted)
  Top 0.254: U4.18 17.55,14.96 18.16,14.35 18.84,14.35 X2.P$2
N$22
  Top 0.203: R3.2 7.62,47.77 D2.C
N$24  (via drill 0.33)
  Top 0.203: U3.13 12.95,35.69 v12.47,35.18 | v5.64,36.3 R17.2
  Bottom 0.203: v5.64,36.3 5.64,35.89 7.37,34.16 11.4,34.16 12.42,35.18 v12.47,35.18
N$25  (3 unrouted)
  Top 0.203: U3.9 10.41,36.09 9.8,36.09 9.12,35.41 7.34,35.41 6.73,34.8
N$26
  Top 0.203: U3.8 10.19,36.85 10.05,36.85 8.97,35.76 7.11,35.76 6.35,35 6.35,32.18 5.36,31.19 5.36,29.07 R8.2
N$27
  Top 0.406: L2.1 R24.1 9.85,7.72 C9.1
N$28  (1 unrouted)
  Top 0.406: 9.4,6.7 Y1.FEED
N$51
  Top 0.305: 20.05,44.01 S1.3 | S1.3 20.84,43.67 J3.1 | S1.3 19.28,44.02 19.28,43.89 17.46,42.07 Q1.2
  Top 0.33: D3.C 18.89,44.46 19.28,44.02
N$59  (via drill 0.33)
  Top 0.203: U3.11 11.95,35.6 11.66,35.31 11.66,34.75 11.86,34.54 14.81,34.54 15.88,35.61 15.88,39.42 16.61,40.16 16.61,42.32 17.2,42.9 v17.3,42.9 | R14.1 v19.3,46.71
  Bottom 0.203: v19.3,46.71 19.3,44.91 v17.3,42.9
N$62
  Top 0.203: D1.C 18.49,49.7 R14.2
PROG  (via drill 0.33)  (2 unrouted)
  Top 0.203: v8.26,42.52 9.03,42.52 U1.5 | v5.64,38.41 R4.1 | U3.10 11.45,35.63 11.02,35.23 10.41,35.23 v10.24,35.41
  Bottom 0.203: 6.27,36.25 6.27,37.74 v5.64,38.41 R4.1 3.45,39.69 3.45,41.3 4.67,42.52 v8.26,42.52
RESET  (via drill 0.33)  (3 unrouted)
  Top 0.203: v5.64,34.34 5.59,34.37 R6.2 3.74,35.37 R17.1 | v9.75,20.3 9.78,20.3 10.08,20.6 10.08,21.11 10.24,21.26 15.19,21.26 15.32,21.13 15.32,15.09 14.45,14.22 U4.12 | v7.42,24.77 7.29,24.89
  Bottom 0.203: v9.75,20.3 7.42,22.63 v7.42,24.77 | J2.5 14.91,31.75 13.56,33.1 11.66,33.1 11.3,33.45 6.53,33.45 | 6.53,33.45 v5.64,34.34 | 6.53,33.45 7.44,32.54
  other vias: 7.85,31.19
RESET-EN
  Top 0.203: JP-L.P$3 2.65,34.37 R6.1
RF_N
  Top 0.203: U$17.3 12.9,13.36 12.95,13.41 U4.9
RF_P
  Top 0.203: U$17.4 12.5,13.35 12.45,13.41 U4.8
RX0
  Top 0.203: U4.46 9.95,23.05 9.25,23.75 3.27,23.75 JP-L.P$8 2.67,26.42 R15.1
RX1  (via drill 0.33)
  Top 0.203: U4.27 17.58,19.46 18.16,20.04 v18.47,20.04
  Bottom 0.203: v18.47,20.04 18.47,20.14 18.49,20.14 20.34,22 20.34,23.44 20.85,23.95 20.85,25.27 21.16,25.58 21.16,26.85 21.51,27.2 21.51,28.68 21.95,29.11 21.95,30.56 22.33,30.94 22.33,32.33 23.37,33.37 JP-R.P$4
RX/TX  (1 unrouted)
SCK  (via drill 0.33)
  Top 0.203: U4.37 14.45,24.18 13.34,25.3 v13.34,26.9
  Bottom 0.203: JP-L.P$4 2.03,33.37 3.05,32.35 3.05,31.04 4.52,29.57 8.46,29.57 9.07,30.18 9.07,32.11 9.63,32.66 10.87,32.66 11.79,31.75 J2.3 13.59,30.83 13.59,28.73 13.34,28.47 v13.34,26.9
SCL  (via drill 0.33)
  Top 0.203: U4.25 18,18.46 v18.34,18.82 | 23.73,29.39 JP-R.P$6 23.75,29.59 22.28,31.06 21.52,31.06 R22.2 20.68,30.38 19.3,30.38 18.73,30.95 U5.P$7
  Bottom 0.203: v18.34,18.82 18.34,19.23 18.54,19.43 20.42,19.43 20.78,19.79 20.78,21.13 21.21,21.57 21.21,23.11 21.57,23.47 21.57,24.79 21.92,25.15 21.92,26.49 22.33,26.9 22.33,28.33 23.37,29.37 JP-R.P$6
SDA  (via drill 0.33)
  Top 0.203: U4.26 17.62,18.96 18.09,19.43 18.77,19.43 19.2,19 v19.2,18.82 | JP-R.P$7 24.82,28.44 24.82,32.03 24.51,32.33 22.96,32.33 22.3,31.67 21.42,31.67 R23.2 19.83,31.45 U5.P$8
  Bottom 0.203: v19.2,18.82 20.42,18.82 21.18,19.56 21.18,20.95 21.61,21.36 21.61,22.91 21.97,23.27 21.97,24.56 22.3,24.89 22.3,26.3 23.37,27.37 JP-R.P$7
SEROPN  (1 unrouted)
SSN  (via drill 0.33)
  Top 0.203: 14.35,26.82 14.35,26.92 v14.33,26.9 14.33,24.87 14.95,24.24 U4.36
  Bottom 0.203: JP-L.P$7 1.65,27.51 2.46,28.32 8.38,28.32 10.82,25.88 13.26,25.88 14.28,26.9 v14.33,26.9
TX0
  Top 0.203: U4.47 9.45,23.01 9.14,23.32 1.7,23.32 JP-L.P$9 1.47,23.37 0.61,24.23 0.61,28.04 0.99,28.42 3.72,28.42 R8.1 | 9.45,22.66 U4.47 | U4.47
TX1  (via drill 0.33)
  Top 0.203: U4.28 17.52,19.96 18.21,20.65 18.87,20.65 19.3,20.22 v19.3,20.04
  Bottom 0.203: v19.3,20.04 19.28,20.22 20.8,21.74 20.8,23.29 21.21,23.72 21.21,25.04 21.54,25.38 21.54,26.64 21.95,27.05 21.95,28.55 22.35,28.96 22.35,30.35 23.37,31.37 JP-R.P$5
USBD_N
  Top 0.203: U3.30 11.95,42.65 R9.2
USBD_P
  Top 0.203: U3.29 12.42,41.16 12.42,42.38 R10.2
USBDIN_N  (via drill 0.33)
  Top 0.203: R9.1 10.74,42.83 R2.1 11.68,43.57 v11.71,43.54 | USB-JACK.D- 13.35,45.41 12.78,44.83 v11.89,44.83
  Bottom 0.203: v11.89,44.83 11.89,43.74 v11.71,43.54
USBDIN_P  (via drill 0.33)
  Top 0.203: 13.92,42.88 R10.1 13.41,43.06 R13.1 13.41,43.34 13.41,43.33 12.8,43.33 v12.6,43.54 | USB-JACK.D+ 12.7,45.67 v12.55,45.52
  Bottom 0.203: v12.55,45.52 12.55,43.71 12.62,43.61 12.57,43.56 v12.6,43.54
VBAT  (via drill 0.33)
  Top 0.254: U5.P$3 U5.P$2 18.73,33.79 19.33,34.39 22.77,34.39 JP-R.P$3
  Top 0.305: U1.3 7.28,44.26 7.67,43.87 v9.09,43.87 | Q1.3 19.53,42.83 19.53,42.62 19.1,42.62 v18.47,41.99
  Top 0.381: 6.39,45.32 C5.1 4.64,45.46 4.64,45.43 J4.2 2,43.94 JST.2
  Top 0.406: 6.39,45.32 7.13,45.32 U1.3
  Bottom 0.305: v9.09,43.87 9.09,43.16 10.26,42.01 18.44,42.01 v18.47,41.99 22.71,37.74 22.71,36.2 23.53,35.37 JP-R.P$3
VBUS  (via drill 0.33)
  Top 0.203: 14,47.15 USB-JACK.VBUS | 17.25,44.02 Q1.1 | 7.54,41.6 8.84,41.6 v9.42,41.02 | R25.1 v9.58,34.8
  Top 0.305: USB-JACK.VBUS 14,46.5 13.99,46.51 | 10.03,41.96 10.01,41.94 | R20.1 14.2,45.27 | 17.25,44.02 17.25,45.15 D3.A 16.65,45.95 14.1,45.95 14,45.85
  Top 0.381: 13.99,46.51 13.99,47.6 13.69,47.9 11.07,47.9 10.74,47.57 10.74,46.18 10.01,45.44 10.01,41.94 9.68,41.6 7.54,41.6 7.3,41.84 U1.4 7.27,42.12 C4.1 6.3,41.86 6.15,41.71 2.9,41.71 1.65,40.46 JP-L.P$1 | 14,46.5 14,45.85 14,45.47 R20.1
  Bottom 0.203: 1.65,39.5 JP-L.P$1 | v9.42,41.02 9.25,40.84 9.25,39.01 9.73,38.53 10.74,38.53 11.12,38.15 11.12,35.15 10.77,34.8 v9.58,34.8
VBUS-SENSE  (via drill 0.33)  (2 unrouted)
  Top 0.203: 6.99,20.52 7.54,19.96 U4.53 | U3.6 9.77,37.86 8.74,36.83 v8.74,36.47 | R25.2 9.58,33.01 R26.2 8.64,34.7 v8.74,34.8
  Bottom 0.203: v8.74,36.47 v8.74,34.8 | v5.97,20.52 6.78,21.34 6.78,25.7
VCC  (via drill 0.33, 0.51)  (6 unrouted)
  Top 0.203: D1.A 18.07,48.11 17.73,48.11 v17.37,47.75 | D2.A 6.18,49.9 v6.17,49.89 | C18.1 14.93,41.78 13.61,41.78 13.45,41.62 U3.27 13.45,40.6 13.28,40.44 11.11,40.44 10.95,40.59 | U3.31 | U3.32 10.95,40.59 | 10.95,40.59 10.87,40.51 10.87,38.96 10.77,38.86 U3.4 9.78,38.86 9.53,38.61 9.53,38.15 8.74,37.36 7.64,37.36 | C18.1 15.54,43.2 v15.57,43.23 | C21.1 | C18.1 15.54,42.06 R44.2 | C31.1 7.75,37.28 v7.75,36.47
  Top 0.254: U3.31 U3.32 | U4.34 C21.1 | C21.1 16.78,24.41 v16.94,24.41 | U4.44 10.95,23.47 9.75,24.66 C22.1 9.7,24.72 v8.94,25.48 | v6.68,19.89 7.31,19.26 C10.1 7.69,19.46 U4.54
  Top 0.305: v10.36,27.86 10.36,27.89 11.22,28.75 U8.P$2 | C2.1 18.25,38.23 U2.P$4 | C2.1 C24.1 | L3.2 16.74,37.08 v17.02,37.36 | v17.02,37.36 17.47,37.82 C2.1 | v17.02,37.36 17.36,36.97 U7.P$3
  Bottom 0.203: 9.61,37.34 8.62,37.34 v7.75,36.47
  Bottom 0.305: v10.36,27.86 10.36,29.04 J2.2
  pour Power: 0.03,50.83 25.4,50.83 25.4,7.57 -0.03,7.57 -0.03,50.8
VCC-AE
  Top 0.305: U7.P$1 19.5,36.32 C3.1 20.2,36.63 22.89,39.32 23.7,39.32 JP-R.P$1
VIN
  Top 0.203: U2.P$3 18.28,39.02 18.49,38.81 19.05,38.81 19.28,39.04 U2.P$1
  Top 0.305: S1.2 20.7,46.3 23.44,46.3 24.23,45.52 24.23,42.55 23.38,41.69 J3.2 23.38,41.31 22.4,40.34 19.89,40.34 C6.1 | 19.48,40.74 C6.1 | U2.P$1 19.28,40.68 C6.1
X1_N
  Top 0.203: X1.P$3 5.22,17.96 5.27,17.96 5.77,18.46 | U4.56 5.77,18.46 | 5.77,18.46 4.37,18.46 C13.1
X1_P  (1 unrouted)
  Top 0.203: 6.33,15.85 X1.P$1 7.19,16.79 7.19,17.42 7.73,17.96 U4.57
X3_N
  Top 0.203: U3.2 9.65,39.85 8.89,39.09 X3.P$1 7.69,38.45 C16.1
X3_P
  Top 0.203: U3.1 9.47,40.36 8.99,39.88 7.97,39.88 X3.P$3 6.8,41.05 C17.1

## Text on the board
tPlace: OFF | ON | 3V3 | VUSB | GND | BKPK | VBAT | RST | RX1 | SCK | TX1 | MISO | SCL | MOSI | SDA | SS | AREF | RX0 | A0 | TX0 | A1 | D2 | A2 | D3 | A3 | D4 | A4 | D5 | A5 | D6 | A6 | D7 | A7 | D8
bPlace: pinoccio v1.1 | http://pinocc.io | 2013-08-15 | - | + | switch | 16U2 | 256RFR2
tDocu: Pinoccio(tm) v1.1 | Design by: Eric Jennings for Pinoccio | http://pinocc.io | Licensed under CERN OHL v.1.1